# Altium PCB ReceiverLoRa.PcbDoc
Units mm, origin at the board's own origin, x right, y up, seen from the top; angles counter-clockwise.
Board outline 68.2 x 27.05 mm, 2 copper layers (Top Layer, Top, Bottom Layer, Bottom); 51 components, 34 nets, 163 pads, 16 vias.
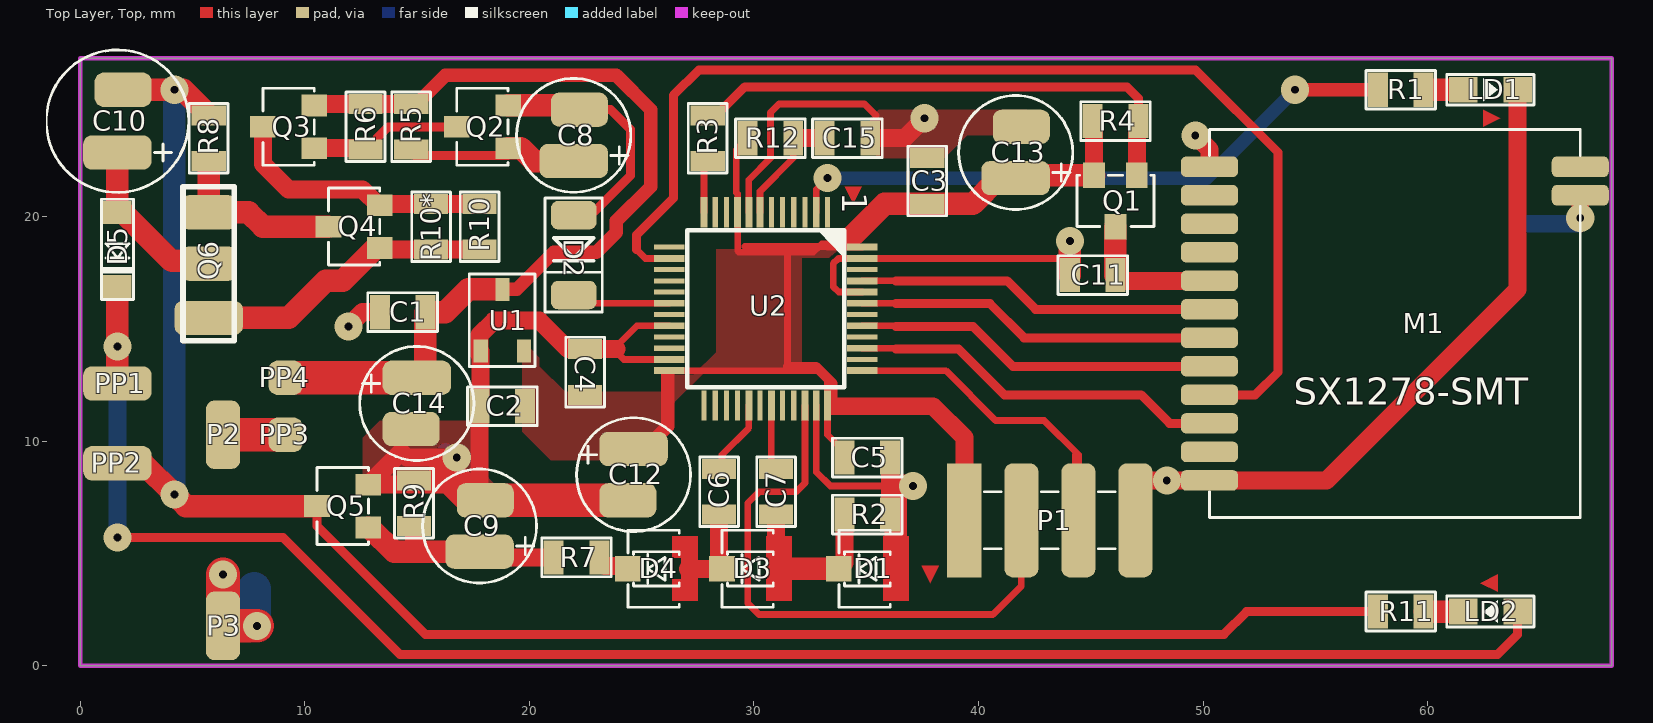
[diagram p0: Top Layer, Top view]
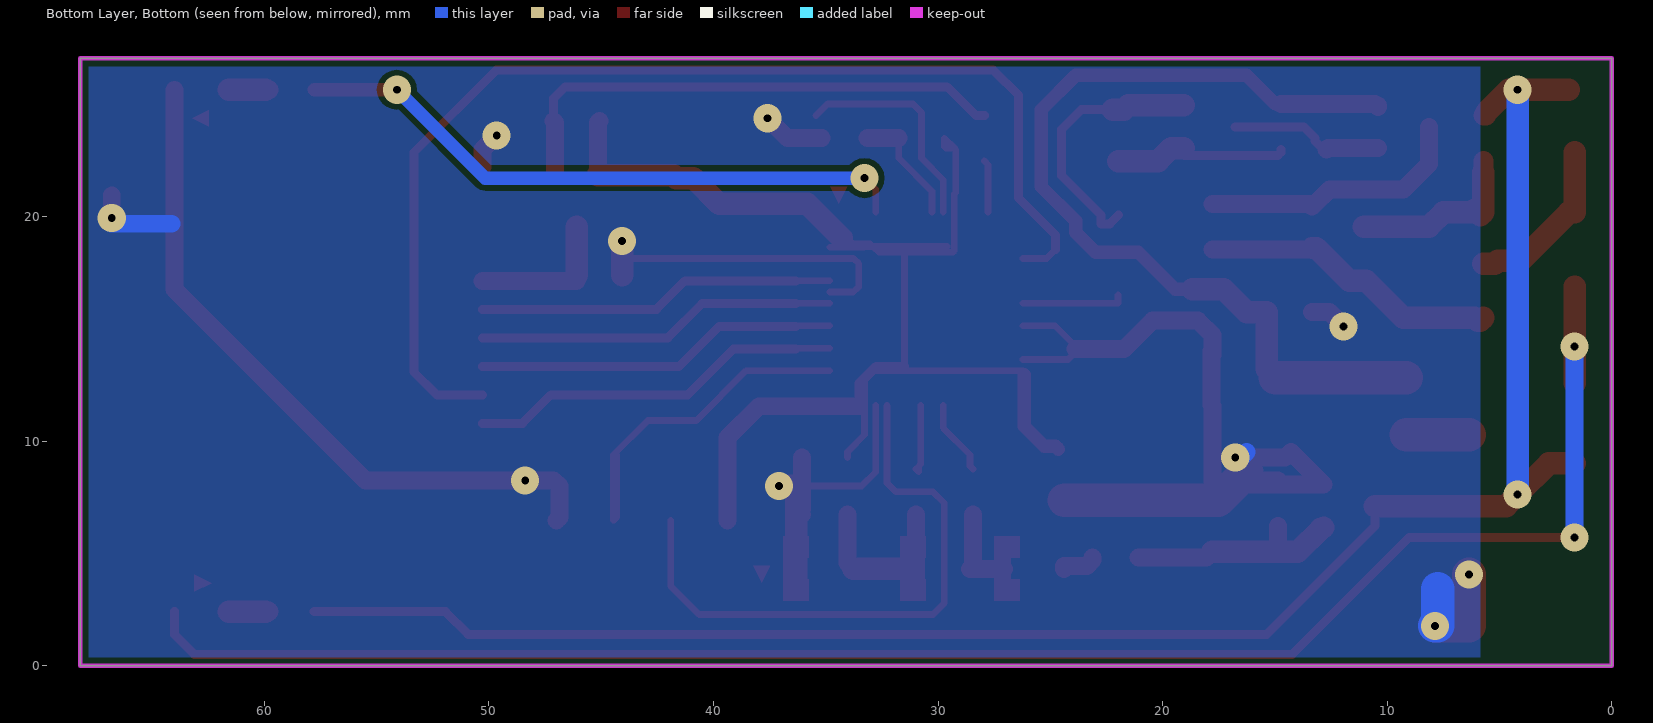
[diagram p1: Bottom Layer, Bottom view, seen from below]

## Layer stack, top to bottom
Top Solder, Top Mask: solder mask 0.0102, Solder Resist, Dk 3.5
Top Layer, Top: signal copper 0.0356
Dielectric 1: dielectric 0.32, FR-4, Dk 4.8
Bottom Layer, Bottom: signal copper 0.0356
Bottom Solder, Bot Mask: solder mask 0.0102, Solder Resist, Dk 3.5

## Board outline
0,27.051 0,0 68.199,0 68.199,27.051

## Design rules (kind name [scope] priority, off if disabled: settings)
Clearance "Clearance_Top Layer, Top" [ExistsOnLayer('Top Layer, Top') vs ExistsOnLayer('Top Layer, Top')] p1: gap=0.15 ignorepadtopadclearanceinfootprint=FALSE except(0.2: THPad-THPad)
Clearance [All] p2: gap=0.254 ignorepadtopadclearanceinfootprint=FALSE except(0: Arc-Hole Track-Hole SMDPad-Hole THPad-Hole Via-Hole Fill-Hole Poly-Hole Region-Hole Text-Hole; 0.15: THPad-THPad; 0.2: Arc-Arc Arc-Track Arc-THPad Arc-Via Track-Track Track-THPad Track-Via THPad-Via Via-Via)
PlaneClearance [All] p1: clearance=0.254
PolygonConnect PolygonConnect_6 [IsPolygon And InNet('GND') And OnLayer('Bottom Layer, Bottom') vs IsVia] p1: connectstyle=Direct reliefconductorwidth=0.381 reliefentries=4 polygonreliefangle="90 Angle" airgapwidth=0.254
PolygonConnect PolygonConnect_5 [IsPolygon And InNet('GND') And OnLayer('Bottom Layer, Bottom') vs IsPad] p2: connectstyle=Direct reliefconductorwidth=0.381 reliefentries=4 polygonreliefangle="90 Angle" airgapwidth=0.254
PolygonConnect PolygonConnect_4 [IsPolygon And InNet('GND') And OnLayer('Top Layer, Top') vs IsVia] p3: connectstyle=Direct reliefconductorwidth=0.381 reliefentries=4 polygonreliefangle="90 Angle" airgapwidth=0.254
PolygonConnect PolygonConnect_3 [IsPolygon And InNet('GND') And OnLayer('Top Layer, Top') vs IsPad] p4: connectstyle=Direct reliefconductorwidth=0.381 reliefentries=4 polygonreliefangle="90 Angle" airgapwidth=0.254
PolygonConnect PolygonConnect_2 [IsPolygon And InNet('3V3') And OnLayer('Top Layer, Top') vs IsVia] p5: connectstyle=Direct reliefconductorwidth=0.381 reliefentries=4 polygonreliefangle="90 Angle" airgapwidth=0.254
PolygonConnect PolygonConnect_1 [IsPolygon And InNet('3V3') And OnLayer('Top Layer, Top') vs IsPad] p6: connectstyle=Direct reliefconductorwidth=0.381 reliefentries=4 polygonreliefangle="90 Angle" airgapwidth=0.254
PolygonConnect [All] p7: connectstyle=Relief reliefconductorwidth=0.254 reliefentries=4 polygonreliefangle="90 Angle" airgapwidth=0.254
RoutingVias [All] p1: holewidth=0.711 width=1.27 viastyle="Through Hole" minholewidth=0.711 minwidth=1.27 maxholewidth=0.711 maxwidth=1.27
SolderMaskExpansion [All] p1: expansion=0.102 istentingtop=FALSE
Width [All] p1: maxlimit=0.254 minlimit=0.254 preferedwidth=0.254
29 further rules are at their usual default settings.

## Components (designator, comment, footprint, x,y, rotation, side; value= is the part's Value field where it differs from the comment)
C1 "1u" C0805 14.351,15.748 r0 top
C2 "1u" C0805 18.796,11.557 r0 top
C3 "100n" C0805 37.719,21.59 r90 top
C4 "1u" C0805 22.479,13.081 r270 top
C5 "100n" C0805 35.052,9.271 r0 top
C6 "1u" C0805 28.448,7.747 r90 top
C7 "1u" C0805 30.988,7.747 r270 top
C8 "47u 16V" ECAP-SD-D5L11 21.971,22.479 r90 top
C9 "47u 16V" ECAP-SD-D5L11 17.78,5.08 r90 top
C10 "100u" ECAP-SD-D6.3L11 1.651,22.86 r90 top
C11 "100n" C0805 45.085,17.399 r0 top
C12 "10u 16V" ECAP-SD-D5L11 24.638,9.652 r270 top
C13 "10u 16V" ECAP-SD-D5L11 41.656,21.717 r90 top
C14 "10u 16V" ECAP-SD-D5L11 14.986,12.827 r270 top
C15 "100n" C0805 34.163,23.495 r0 top
D1 "" SOD323-SOT23 34.925,4.318 r90 top
D2 "" SOD80_1N4148(Primary) 21.971,18.161 r270 top
D3 "" SOD323-SOT23 29.718,4.318 r90 top
D4 "" SOD323-SOT23 25.527,4.318 r90 top
D5 "" SOD-123FL 1.651,18.542 r270 top
LD1 "Yellow" "LED_SMD_0805_FYLS-0805BYC LED(Primary)" 62.738,25.654 r0 top
LD2 "Red" "LED_SMD_0805_FYLS-0805URC LED(Primary)" 62.865,2.413 r180 top
M1 "" SX1278-SMT_MODULE 58.801,14.605 r0 top
P1 "ICSP" PLS-04SMD 43.18,6.477 r0 top
P2 "B+" PAD_RRX60Y120D0T 6.35,10.287 r0 top
P3 "B-" PAD_RRX60Y120D0T 6.35,1.778 r180 top
PP1 "" PAD_RRX60Y120D0T 1.651,12.573 r90 top
PP2 "" PAD_RRX60Y120D0T 1.651,9.017 r90 top
PP3 "JMP" PAD_RRX60Y60D0T 9.144,10.287 r0 top
PP4 "JMP" PAD_RRX60Y60D0T 9.144,12.827 r0 top
Q1 "" SOT23 46.101,20.701 r180 top
Q2 "" SOT23 17.907,24.003 r90 top
Q3 "" SOT23 9.271,24.003 r90 top
Q4 "" SOT23 12.192,19.558 r90 top
Q5 "" SOT23 11.684,7.112 r90 top
Q6 "" "TO225 VH_Primary" 5.715,17.907 r90 top
R1 "10K" R0805 58.801,25.654 r0 top
R2 "100K" R0805 35.052,6.731 r0 top
R3 "1K" R0805 27.94,23.495 r270 top
R4 "10K" R0805 46.101,24.257 r180 top
R5 "10K" R0805 14.732,24.003 r90 top
R6 "10K" R0805 12.7,24.003 r90 top
R7 "150K" R0805 22.098,4.826 r0 top
R8 "62" R0805 5.715,23.495 r90 top
R9 "150K" R0805 14.859,7.239 r90 top
R10 "1" R0805 17.78,19.558 r270 top
R10* "100" R0805 15.621,19.558 r270 top
R11 "1K" R0805 58.801,2.413 r180 top
R12 "1K" R0805 30.734,23.495 r180 top
U1 "" SOT23A 18.796,15.367 r0 top
U2 "" "LQFP48 7X7" 33.274,20.193 r270 top

## Footprints (in the part's own frame and the unit in brackets; to place one, negate y for a bottom-side part, rotate by r counter-clockwise, add the part's x,y. Pads: shape width x height; smd on the part's side, far side on the other; paste and mask are expansions set on the pad)
C0805 [mil]
  rect 35x60 smd: 1(-40,0) 2(40,0)
  silkscreen extent -61,-34 61,34
ECAP-SD-D5L11 [mil]
  rrect50% 60x120 smd: 1(0,0)
  rrect50% 60x100 smd: 2(90,-10)
  silkscreen extent -55,-100 145,100
ECAP-SD-D6.3L11 [mil]
  rrect50% 60x120 smd: 1(0,0)
  rrect50% 60x100 smd: 2(110,-10)
  silkscreen extent -70,-125 180,125
"LED_SMD_0805_FYLS-0805BYC LED(Primary)" [mil]
  rect 50x45 smd: A(-45,0) K(50,0)
  silkscreen extent -74,-27 79,27
"LED_SMD_0805_FYLS-0805URC LED(Primary)" [mil]
  rect 50x45 smd: A(-45,0) K(50,0)
  silkscreen extent -74,-27 79,27
"LQFP48 7X7" [mil]
  rect 53x9 smd: 1(0,0) 3(0,-39.37) 4(0,-59.06) 5(0,-78.74) 6(0,-98.43) 10(0,-177.17) 11(0,-196.85) 25(338.58,-216.54) 26(338.58,-196.85) 27(338.58,-177.17) 28(338.58,-157.48) 30(338.58,-118.11) 32(338.58,-78.74) 33(338.58,-59.06)
  rect 53x12 smd: 2(0,-19.68) 7(0,-118.11) 8(0,-137.8) 9(0,-157.48) 12(0,-216.54) 29(338.58,-137.8) 31(338.58,-98.43) 34(338.58,-39.37) 35(338.58,-19.68) 36(338.58,0)
  rect 9x53 smd: 13(61.02,-277.56) 15(100.39,-277.56) 16(120.08,-277.56) 17(139.76,-277.56) 19(179.13,-277.56) 21(218.5,-277.56) 22(238.19,-277.56) 38(257.87,61.02) 40(218.5,61.02) 42(179.13,61.02) 46(100.39,61.02)
  rect 12x53 smd: 14(80.71,-277.56) 18(159.45,-277.56) 20(198.82,-277.56) 23(257.87,-277.56) 24(277.56,-277.56) 37(277.56,61.02) 39(238.19,61.02) 41(198.82,61.02) 43(159.45,61.02) 44(139.76,61.02) 45(120.08,61.02) 47(80.71,61.02) 48(61.02,61.02)
  silkscreen extent 31,-246 307,30
PAD_RRX60Y60D0T [mil]
  rrect50% 60x60 smd: 1(0,0)
PAD_RRX60Y120D0T [mil]
  rrect50% 60x120 smd: 1(0,0)
PLS-04SMD [mil]
  rect 60x200 smd: 1(-150,0)
  rrect50% 60x200 smd: 2(-50,0) 3(50,0) 4(150,0)
  silkscreen extent -115,-50 115,50
R0805 [mil]
  rect 35x60 smd: 1(-40,0) 2(40,0)
  silkscreen extent -61,-34 61,34
SOD80_1N4148(Primary) [mil]
  rrect50% 50x80 smd: A(-75,0) K(65,0)
  silkscreen extent -105,-50 95,50
SOD323-SOT23 [mil]
  round 0 smd paste-1000 mask-1000: 1(0,-61.5)
  rect 45x45 smd: 2(0,45)
  Top Layer, Top region: -56,-77.5 19,-77.5 57,-77.5 57,-32.5 19,-32.5 19,-49 -18,-49 -18,-32.5 -56,-32.5
  silkscreen extent -68,-45 68,45
SOD-123FL [mil]
  rect 40x50 smd: 1(-65,0) 2(65,0)
  silkscreen extent -88,-28 88,28
SOT23 [mil]
  rect 38x45 smd: 1(-37.5,-45) 2(37.5,-45) 3(0,45)
  silkscreen extent -68,-45 68,45
SOT23A [mil]
  rect 25x40 smd: 1(-38,-53) 2(38,-53) 3(0,55)
  silkscreen extent -58,-80 57,82
SX1278-SMT_MODULE [mil]
  rrect50% 100x36 smd: 1(-335,300) 2(-335,250) 3(-335,200) 4(-335,150) 5(-335,100) 6(-335,50) 7(-335,0) 8(-335,-50) 9(-335,-100) 10(-335,-150) 11(-335,-200) 12(-335,-250) 13(315,250) 14(315,300)
  silkscreen extent -335,-315 315,365
"TO225 VH_Primary" [mil]
  rrect50% 60x120 smd: 1(-95,0)
  rrect50% 60x100 smd: 2(0,0) 3(90,0)
  silkscreen extent -135,-45 135,45

## Part data
LD1: "Yellow LED. 2.6Vf"
LD2: "Ultra Red. Vf-1.85V(2.2V max)"

## Via types
v1: diameter 1.25, hole 0.35, Top Layer, Top to Bottom Layer, Bottom, 16 vias

## Nets (pads, with @x,y where several pads share a name; then routed paths per layer and width w, separated by ;. In a path a pad name is that pad's centre, name@x,y a point inside that pad or via, vN(x,y) a via of type N, cw(c..) or ccw(c..) an arc to the next point about the centre after c; other vN are vias at no path point)
3V3: C2.2 C3.1 C4.2 C5.1 C12.1 C13.1 P1.1 Q1.2 R4.2 R12.2 U1.2 U2.9 U2.24 U2.36 U2.48 | length 67.2
  Top Layer, Top w0.3: 26.162,12.954 26.224,12.892 ; 26.224,12.889 26.224,12.892 ; 29.591,18.669 31.496,18.669 ; C5.1 34.036,9.525 33.274,10.287 U2.36 33.274,12.7 32.831,13.143 ; 34.036,19.05 33.782,18.796 33.02,18.796 32.893,18.669 ; 34.29,19.05 34.544,18.796 34.544,18.669 U2.48@34.57,18.643 ; U2.48 U2.48@34.57,18.643 ; 26.224,12.892 U2.24 32.831,13.143 ; R12.2@29.274,23.051 R12.2 29.718,23.114 29.655,23.051 R12.2@29.274,23.051 ; R12.2@29.274,23.051 29.21,22.987 29.21,21.082 29.274,21.018 U2.9 29.274,18.478 29.337,18.415 31.496,18.415 ; 31.496,18.415 31.496,13.335 31.496,13.208 32.766,13.208 32.831,13.143 ; 31.496,18.415 32.639,18.415 32.893,18.669 ; 31.496,18.415 31.496,18.669 ; 31.496,18.669 32.893,18.669 ; 32.893,18.669 33.274,18.669 33.3,18.643 U2.48@34.57,18.643
  Top Layer, Top w0.4: 31.496,13.335 32.766,13.335 33.528,12.573 33.528,11.557
  Top Layer, Top w0.6: C12.1 24.765,9.779 25.273,9.779 26.162,10.668 26.162,12.954
  Top Layer, Top w0.8: 33.528,11.557 37.973,11.557 39.37,10.16 P1.1 ; R4.2 45.148,24.194 Q1.2
  Top Layer, Top w1: 34.29,19.05 35.814,20.574 C3.1 39.751,20.574 40.894,21.717 C13.1 41.783,21.844 Q1.2
/ENSC: D2.K U2.18 | length 4.6
  Top Layer, Top w0.3: D2.K 21.985,16.496 21.985,16.143 U2.18
/INP: C6.2 U2.29 | length 3.4
  Top Layer, Top w0.3: C6.2 28.575,8.89 28.575,9.398 29.774,10.597 U2.29
/RF_0N: R3.2 U2.12 | length 2.4
  Top Layer, Top w0.3: U2.12 27.774,22.313 R3.2
/SS: M1.9 U2.14 | length 51.3
  Top Layer, Top w0.3: 24.765,18.542 25.164,18.143 U2.14
  Top Layer, Top w0.4: 24.765,18.542 24.765,19.177 26.416,20.828 26.416,25.4 27.559,26.543 49.657,26.543 53.34,22.86 53.34,13.081 52.324,12.065 M1.9
GND: C1.1 C2.1 C3.2 C4.1 C5.2 C9.2 C11.1 C12.2 C13.2 C14.2 C15.2 D1.1 LD1.K M1.1 M1.12 M1.13 P1.4 P3.1 Q5.2 R2.2 R9.2 U1.1 U2.8 U2.20 U2.23 U2.35 U2.44 U2.47 | length 128.9
  Top Layer, Top w0.3: U2.23 24.203,13.643 23.749,14.097 24.795,15.143 U2.20 ; U2.8 29.774,21.646 30.734,22.606 30.734,24.638 31.115,25.019 34.925,25.019 35.433,24.511 ; U2.35 32.774,8.628 33.401,8.001 36.068,8.001 ; U2.44 33.776,16.643 33.528,16.891 33.528,17.907 33.764,18.143 U2.47 44.051,18.143 44.069,18.161 ; C15.2@35.052,23.622 C15.2 ; R2.2 R2.2@36.068,6.985 ; 36.322,4.572 36.487,4.407 D1.1
  Top Layer, Top w0.635: U1.1@17.78,13.843 U1.1@17.831,13.894
  Top Layer, Top w0.8: v1(11.938,15.113) 12.573,15.748 C1.1 ; R9.2 16.383,8.255 16.51,8.128 16.51,8.001 16.447,8.064 Q5.2 14.287,9.525 14.541,9.271 v1(16.764,9.271) ; U1.1@17.78,13.843 17.78,14.732 18.415,15.367 20.447,15.367 21.717,14.097 C4.1 23.749,14.097 23.876,14.097 ; U1.1 17.831,13.894 17.831,11.608 C2.1 17.78,7.366 17.907,7.239 C9.2 ; C15.2 36.703,23.495 v1(37.592,24.384) ; R2.2 R2.2@36.322,6.731 ; R2.2@36.068,6.985 36.068,7.62 ; C5.2 36.068,8.128 ; 36.322,7.874 36.068,7.62 ; v1(37.084,8.001) 37.084,8.128 36.068,8.128 ; P1.4 46.863,6.604 46.863,7.366 46.863,8.001 47.117,8.255 v1(48.387,8.255) M1.12 55.499,8.255 64.008,16.764 LD1.K ; v1(49.657,23.622) 50.292,22.987 M1.1 ; v1(66.802,19.939) M1.13 ; 36.068,7.62 36.068,8.001 36.068,8.128
  Top Layer, Top w1: v1(37.084,8.001) 36.449,8.001 36.322,7.874 36.322,6.731 36.322,4.572 36.322,4.318 ; C11.1 44.069,18.161 v1(44.069,18.923) ; 36.322,4.318 36.322,3.429 36.36,3.467 36.36,4.191 36.322,4.318
  Top Layer, Top w1.5: v1(6.35,4.064) P3.1 v1(7.874,1.778) ; 16.256,8.636 17.526,7.366 17.78,7.366 C9.2 C12.2
  Bottom Layer, Bottom w0.8: v1@16.256,9.525 16.51,9.271 v1(16.764,9.271) ; v1@48.26,8.255 v1(48.387,8.255) ; 64.135,19.685 66.802,19.685 v1(66.802,19.939)
  Bottom Layer, Bottom w1.5: 7.747,3.429 7.747,1.778 v1(7.874,1.778)
INP: C7.1 U2.31 | length 3.2
  Top Layer, Top w0.3: U2.31 30.774,8.977 30.861,8.89 30.861,8.636 C7.1
IRQ_RF: M1.10 U2.39 | length 16.9
  Top Layer, Top w0.3: U2.39 36.276,14.143 36.322,14.097
  Top Layer, Top w0.4: 36.322,14.097 39.116,14.097 41.148,12.065 47.244,12.065 48.514,10.795 M1.10
MISO: M1.6 U2.45 | length 16
  Top Layer, Top w0.3: U2.45 36.32,17.143 36.322,17.145
  Top Layer, Top w0.4: 36.322,17.145 41.275,17.145 42.545,15.875 M1.6
MOSI: M1.7 U2.43 | length 16.1
  Top Layer, Top w0.3: U2.43 36.308,16.143 36.322,16.129
  Top Layer, Top w0.4: 36.322,16.129 40.513,16.129 42.037,14.605 M1.7
NET00000: C7.2 D1.2 D3.1 R2.1 | length 9.5
  Top Layer, Top w0.8: C7.2 30.988,3.556 31.115,3.429 31.28,3.594 D3.1 ; D1.2 34.036,4.572 R2.1
  Top Layer, Top w1: 31.115,4.318 D3.1 D1.2
NET00001: C10.1 D5.1 Q6.2 | length 7.7
  Top Layer, Top w1: C10.1 D5.1 1.905,20.193 4.064,18.034 5.08,18.034 5.207,17.907 Q6.2
NET00002: C10.2 PP2.1 Q5.3 R8.2 R11.2 | length 82.8
  Top Layer, Top w0.4: Q5.3 10.541,6.223 15.367,1.397 50.927,1.397 51.943,2.413 R11.2
  Top Layer, Top w0.889: R8.2@5.588,24.511 R8.2 5.588,24.638 R8.2@5.588,24.511
  Top Layer, Top w1: PP2.1 2.794,9.017 v1(4.191,7.62) 4.699,7.112 Q5.3 ; C10.2 v1(4.191,25.654) 4.572,25.654 R8.2@5.588,24.638
  Bottom Layer, Bottom w1: v1(4.191,7.62) v1(4.191,25.654)
NET00003: D5.2 LD2.A PP1.1 | length 78.7
  Top Layer, Top w0.4: v1(1.651,5.715) 9.017,5.715 14.224,0.508 63.119,0.508 64.008,1.397 LD2.A
  Top Layer, Top w1: PP1.1 v1(1.651,14.224) D5.2
  Bottom Layer, Bottom w0.8: v1(1.651,5.715) v1(1.651,14.224)
NET00004: Q4.1 Q6.1 R10*.2 R10.2 | length 13.6
  Top Layer, Top w0.8: Q4.1 13.335,18.669 13.462,18.542 R10*.2 R10.2
  Top Layer, Top w1: Q6.1 5.842,15.367 5.969,15.367 6.096,15.494 9.271,15.494 10.922,17.145 11.684,17.145 13.144,18.605 Q4.1
NET00005: Q4.3 Q6.3 R8.1 | length 8.1
  Top Layer, Top w0.889: 5.715,21.971 R8.1
  Top Layer, Top w1: 5.715,21.971 Q6.3 5.842,20.066 6.096,20.32 6.223,20.193 7.493,20.193 8.128,19.558 Q4.3
NET00006: C6.1 D3.2 D4.1 | length 4
  Top Layer, Top w0.8: 27.051,4.318 D4.1 D3.2 28.448,4.445 C6.1
NET00007: Q3.3 Q4.2 R10*.1 R10.1 | length 12.2
  Top Layer, Top w0.8: Q3.3 8.128,22.352 9.271,21.209 12.573,21.209 13.271,20.511 Q4.2 13.335,20.447 13.462,20.574 R10*.1 R10.1
NET00008: D4.2 R7.2 | length 1.6
  Top Layer, Top w0.8: R7.2 23.114,4.699 23.368,4.445 24.384,4.445 D4.2
NET00009: Q2.3 Q3.1 R6.1 | length 6.9
  Top Layer, Top w0.4: R6.1 12.827,22.987 13.208,23.368 13.208,23.495 13.716,24.003 Q2.3
  Top Layer, Top w0.8: Q3.1 12.636,23.05 R6.1
NET00011: R1.1 U2.2 | length 27.9
  Top Layer, Top w0.3: U2.2 32.774,21.217 v1(33.274,21.717)
  Top Layer, Top w0.6: v1(54.102,25.654) R1.1
  Bottom Layer, Bottom w0.6: v1(33.274,21.717) 50.165,21.717 v1(54.102,25.654)
NET00012: LD1.A R1.2 | length 1.8
  Top Layer, Top w0.889: R1.2 R1.2@59.944,25.654
  Top Layer, Top w1: R1.2@59.944,25.654 LD1.A
NET00013: C9.1 Q5.1 R7.1 R9.1 | length 10
  Top Layer, Top w0.8: 14.859,5.08 R9.1 ; C9.1 18.034,4.826 R7.1
  Top Layer, Top w0.965: Q5.1 12.89,6.096 Q5.1@12.954,6.096
  Top Layer, Top w1: Q5.1@12.954,6.096 13.97,5.08 14.859,5.08 C9.1
NET00015: C8.1 Q2.1 R5.1 | length 8
  Top Layer, Top w0.4: R5.1 14.732,22.86 14.859,22.733 19.05,22.733 Q2.1
  Top Layer, Top w1: Q2.1 19.241,23.05 19.621,23.05 20.193,22.479 21.59,22.479 C8.1
NET00017: C8.2 D2.A Q2.2 | length 11.8
  Top Layer, Top w0.4: D2.A 22.352,19.685 22.733,19.685 22.733,20.066 22.987,20.32 24.511,21.844 24.511,23.876 23.622,24.765 22.606,24.765 C8.2
  Top Layer, Top w1: Q2.2 21.145,24.956 21.526,24.956 21.717,24.765 21.844,24.765 C8.2
NET00020: LD2.K R11.1 | length 1.8
  Top Layer, Top w0.889: R11.1 R11.1@59.944,2.413
  Top Layer, Top w1: R11.1@59.944,2.413 LD2.K
NET00023: Q1.1 R3.1 R4.1 | length 23.4
  Top Layer, Top w0.4: R3.1 28.321,24.511 29.591,25.781 46.609,25.781 47.117,25.273 R4.1
  Top Layer, Top w0.8: Q1.1 47.053,24.194 R4.1
NET00027: P2.1 PP3.1 | length 2.8
  Top Layer, Top w1.5: P2.1 PP3.1
RST: C15.1 R12.1 U2.7 | length 5.3
  Top Layer, Top w0.3: U2.7 30.274,21.13 31.75,22.606 R12.1
  Top Layer, Top w0.8: R12.1 C15.1
SCK: M1.8 U2.41 | length 16.2
  Top Layer, Top w0.3: U2.41 36.292,15.143 36.322,15.113
  Top Layer, Top w0.4: 36.322,15.113 39.751,15.113 41.529,13.335 M1.8
SWCLK: P1.3 U2.37 | length 17.1
  Top Layer, Top w0.3: U2.37 38.546,13.143 40.767,10.922 42.926,10.922 44.45,9.398 P1.3 44.323,6.604 44.323,7.366 44.323,9.398
SWDIO: P1.2 U2.34 | length 26.7
  Top Layer, Top w0.3: U2.34 32.274,8.144 31.877,7.747 30.226,7.747 29.718,7.239 29.718,2.794 30.226,2.286 40.64,2.286 41.91,3.556 P1.2
VBAT: C1.2 C14.1 PP4.1 Q3.2 R5.2 R6.2 U1.3 | length 41.3
  Top Layer, Top w0.6: R5.2 14.986,25.019 16.256,26.289 23.876,26.289 25.4,24.765 25.4,21.336 23.876,19.812 23.876,19.304 22.987,18.415 21.082,18.415 19.431,16.764 U1.3
  Top Layer, Top w0.635: U1.3@18.669,16.764 U1.3
  Top Layer, Top w0.8: Q3.2 10.414,24.892 10.541,25.019 R6.2 R5.2
  Top Layer, Top w1: C14.1 15.367,13.208 C1.2 16.256,15.748 17.272,16.764 U1.3@18.669,16.764
  Top Layer, Top w1.5: PP4.1 C14.1
VCC_RF: C11.2 M1.5 Q1.3 | length 6.6
  Top Layer, Top w0.8: C11.2 46.101,17.145 M1.5
  Top Layer, Top w1: C11.2 Q1.3
pads on no net: M1.2 M1.3 M1.4 M1.11 M1.14 U2.1 U2.3 U2.4 U2.5 U2.6 U2.10 U2.11 U2.13 U2.15 U2.16 U2.17 U2.19 U2.21 U2.22 U2.25 U2.26 U2.27 U2.28 U2.30 U2.32 U2.33 U2.38 U2.40 U2.42 U2.46

## Polygon pours and split planes (outlines as drawn)
GND on Top Layer, Top "Top Layer, Top-GND" (solid, pour order 3): 13.335,10.922 12.573,10.16 12.573,8.128 15.875,8.128 17.018,6.985 18.796,6.985 18.796,7.747 17.907,8.636 17.907,10.922 13.843,10.922
3V3 on Top Layer, Top "Top Layer, Top-3V3" (solid, pour order 2): 27.305,12.954 26.162,12.954 26.162,11.43 27.94,13.208 32.131,13.208 32.131,18.161 33.401,18.161 34.036,18.796 34.036,19.05 33.782,19.05 33.274,18.542 28.321,18.542 28.321,13.97
GND on Top Layer, Top "Top Layer, Top-GND 1" (solid, pour order 1): 35.179,22.987 35.56,22.606 38.481,22.606 39.497,23.622 42.799,23.622 42.799,24.13 42.164,24.765 35.56,24.765 35.179,24.384 35.179,23.876
3V3 on Top Layer, Top "Top Layer, Top-3V3 1" (solid, pour order 0): 19.685,14.224 19.685,10.414 20.955,9.144 25.781,9.144 25.908,9.271 25.908,12.192 21.59,12.192 20.447,13.335 20.447,13.589 20.447,13.716 19.939,14.224
GND on Bottom Layer, Bottom "Bottom Layer, Bottom-GND" (solid, remove dead copper, pour order 4): 5.842,26.67 5.842,0.381 67.818,0.381 67.818,26.67

## Keep-outs
Keep-Out Layer, Board:
  lines w0.127: 0,0 68.199,0 68.199,27.051 0,27.051 0,0
  lines w0.2: 0,0 68.199,0 68.199,27.051 0,27.051 0,0

## Other copper
Top Layer, Top:
  region: 63.246,24.384 62.484,24.765 62.484,24.003
  region: 62.357,3.683 63.119,3.302 63.119,4.064
  region: 34.417,20.574 34.798,21.336 34.036,21.336
  region: 37.846,3.683 38.227,4.445 37.465,4.445

## Text inside footprints (layer, text, board x,y; h text height)
M1: Top Overlay, Top Silk "SX1278-SMT" at 54.046,11.628 h1.2
U2: Top Overlay, Top Silk "1" at 33.924,21.099 h1.11 r270